# EAGLE board nanoHC06Rx (EAGLE 9.5.1)
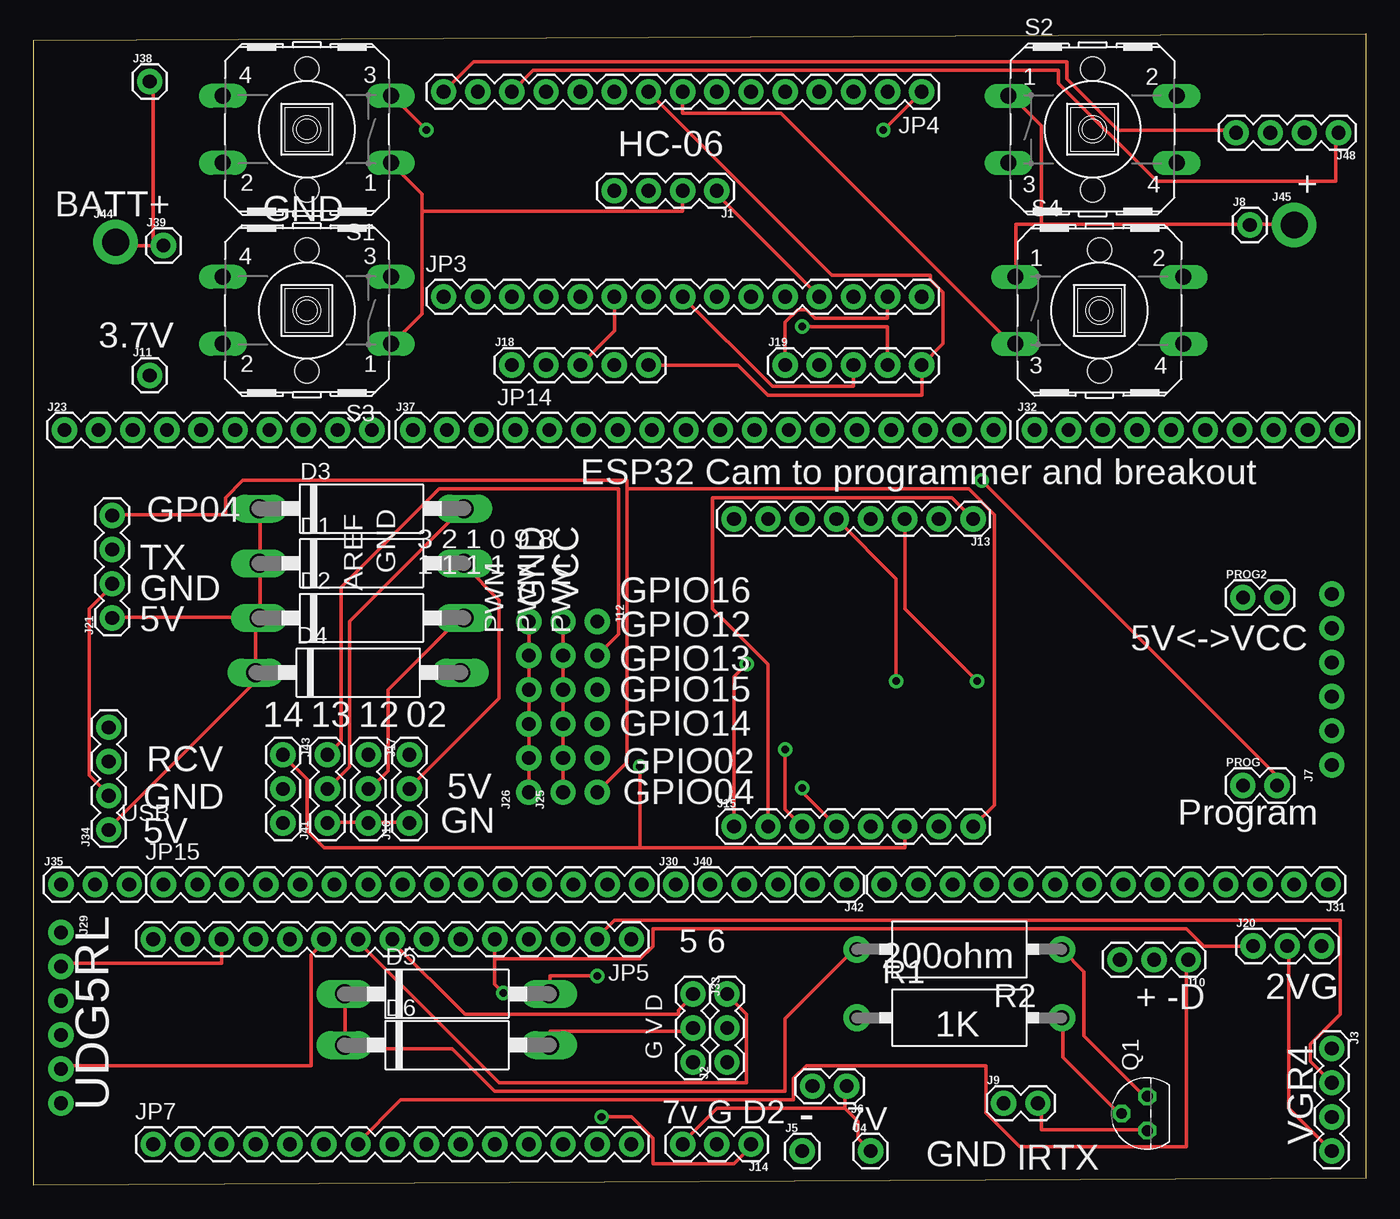
[diagram p0: board, top side]
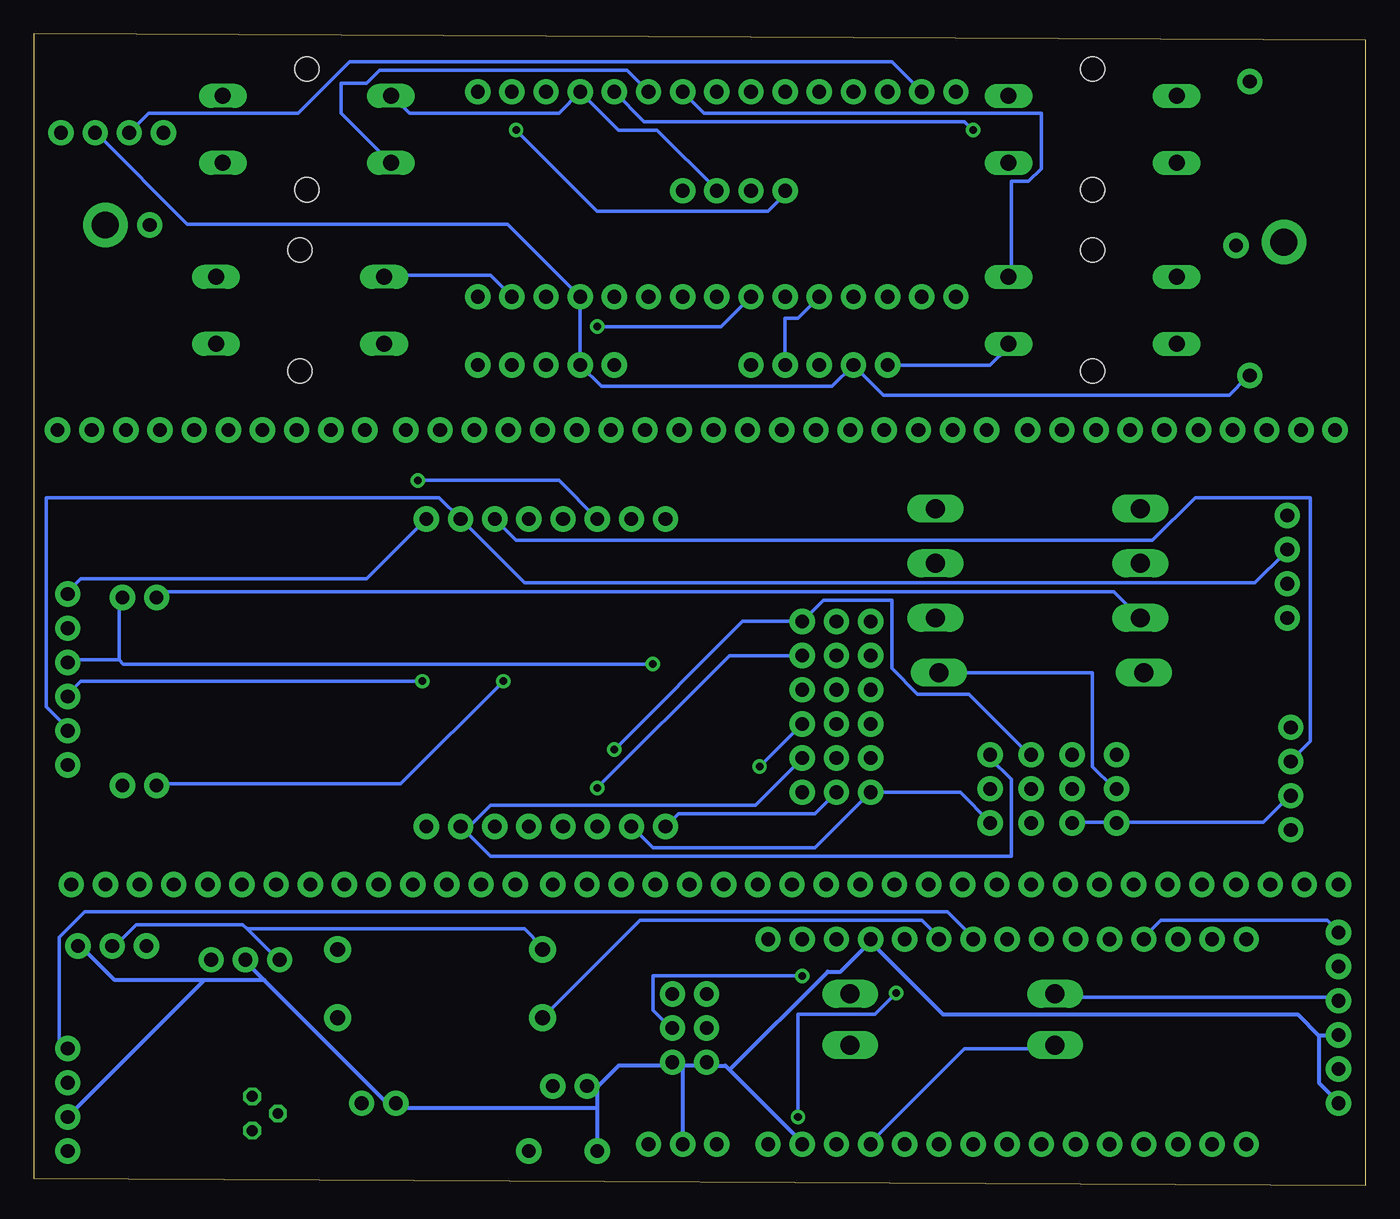
[diagram p1: board, bottom side, seen from below]

Size 99.06 x 85.6 mm. Coordinates in mm from the lower left corner, seen from the top.
Outline: 0,85.09 99.06,85.6 99.06,0.51 0,0 0,85.09
Copper layers (1*16): Top 0.035mm / dielectric 1.5mm / Bottom 0.035mm
Design rules "default": minimum track width 10mil, minimum drill 22mil, track to track 10mil, track to pad 10mil, pad to pad 10mil, via to via 16mil, smd to smd 8mil, copper to edge 30mil, drill to drill 12mil, minimum pad ring 10mil, minimum via ring 10mil, stop-mask expansion 4mil, vias tented up to drill 0mil, thermal gap 10mil
Net classes: 0 default: width 0.254 mm, clearance 0.254 mm; 1 power: width 0.61 mm, drill 0.711 mm, clearance 0.33 mm; 2 gnd: width 0.305 mm, drill 0.711 mm, clearance 0.254 mm; 3 usbvcc: width 0.508 mm, drill 0.711 mm, clearance 0.254 mm; 4 aref: width 0.406 mm
vRestrict: area 25.4,45.5 to 27.1,49.1; area 33.4,41 to 34.9,44.6; area 35.9,41 to 37.5,44.6; area 38.5,41 to 40,44.6; area 42.5,38.6 to 43.1,38.9

## Footprints (pad centres in the part's own frame; a part is rotated, then mirrored left to right if it is on the bottom)
C1702-15 = drill 1.397 long: A 7.62,0; C -7.62,0
1X04 = drill 1.016 pad 1.88: 1 0,0; 2 2.54,0; 3 5.08,0; 4 7.62,0
1X03 = drill 1.016 pad 1.88: 1 0,0; 2 2.54,0; 3 5.08,0
1X01 = drill 1.016 pad 1.88: 1 0,0
1X02 = drill 1.016 pad 1.88: 1 0,0; 2 2.54,0
1X06_NO_SILK = drill 1.016 pad 1.88: 1 0,0; 2 2.54,0; 3 5.08,0; 4 7.62,0; 5 10.16,0; 6 12.7,0
1X08 = drill 1.016 pad 1.88: 1 0,0; 2 2.54,0; 3 5.08,0; 4 7.62,0; 5 10.16,0; 6 12.7,0; 7 15.24,0; 8 17.78,0
1X05 = drill 1.016 pad 1.88: 1 0,0; 2 2.54,0; 3 5.08,0; 4 7.62,0; 5 10.16,0
1X10 = drill 1.016 pad 1.88: 1 0,0; 2 2.54,0; 3 5.08,0; 4 7.62,0; 5 10.16,0; 6 12.7,0; 7 15.24,0; 8 17.78,0; 9 20.32,0; 10 22.86,0
1X14 = drill 1.016 pad 1.88: 1 0,0; 2 2.54,0; 3 5.08,0; 4 7.62,0; 5 10.16,0; 6 12.7,0; 7 15.24,0; 8 17.78,0; 9 20.32,0; 10 22.86,0; 11 25.4,0; 12 27.94,0; 13 30.48,0; 14 33.02,0
1X01_2MM = drill 2 pad 3.302: 1 0,0
1X15@1 = drill 1.016 pad 1.88: 1 0,0; 2 2.54,0; 3 5.08,0; 4 7.62,0; 5 10.16,0; 6 12.7,0; 7 15.24,0; 8 17.78,0; 9 20.32,0; 10 22.86,0; 11 25.4,0; 12 27.94,0; 13 30.48,0; 14 33.02,0; 15 35.56,0
TO92 = drill 0.813 octagon: 1 1.27,0; 2 0,1.905; 3 -1.27,0
CA0001 = drill 1.1 pad 2: 1 -7.62,0; 2 7.62,0
B3F-40XX = drill 1.194 long: 1 -6.248,2.489; 2 6.248,2.489; 3 -6.248,-2.489; 4 6.248,-2.489 | hole 1.803: 0,-4.496; 0,4.496

## Placement (x,y rotation side)
D1  1N5333  [C1702-15]  24.38,46.23 0 top
D2  1N5333  [C1702-15]  24.38,42.16 0 top
D3  1N5333  [C1702-15]  24.38,50.29 0 top
D4  1N5333  [C1702-15]  24.13,38.1 0 top
D5  1N5333  [C1702-15]  30.73,14.22 0 top
D6  1N5333  [C1702-15]  30.73,10.41 0 top
J1  [1X04]  50.8,73.91 180 top
J2  Relay  [1X03]  51.56,9.14 90 top
J3  [1X04]  96.52,10.16 270 top
J4  [1X01]  62.23,2.54 0 top
J5  [1X01]  57.15,2.54 0 top
J6  [1X02]  60.45,7.37 180 top
J7  [1X06_NO_SILK]  96.52,31.24 90 top
J8  [1X01]  90.42,71.37 0 top
J9  [1X02]  72.14,6.1 0 top
J10  Relay  [1X03]  85.85,16.76 180 top
J11  [1X01]  8.64,60.2 0 top
J12  [1X06_NO_SILK]  41.91,41.91 270 top
J13  [1X08]  69.85,49.53 180 top
J14  Relay  [1X03]  53.34,3.05 180 top
J15  [1X08]  52.07,26.67 0 top
J16  Relay  [1X03]  27.94,26.92 90 top
J17  Relay  [1X03]  24.89,32 270 top
J18  [1X05]  35.56,60.96 0 top
J19  [1X05]  55.88,60.96 0 top
J20  Relay  [1X03]  90.68,17.78 0 top
J21  [1X04]  5.84,42.16 90 top
J23  [1X10]  2.29,56.13 0 top
J25  [1X06_NO_SILK]  39.37,29.21 90 top
J26  [1X06_NO_SILK]  36.83,29.21 90 top
J29  [1X06_NO_SILK]  2.03,18.8 270 top
J30  [1X01]  47.75,22.35 0 top
J31  [1X14]  96.27,22.35 180 top
J32  [1X10]  74.42,56.13 0 top
J33  Relay  [1X03]  49.02,14.22 270 top
J34  [1X04]  5.59,26.42 90 top
J35  [1X03]  2.03,22.35 0 top
J37  [1X03]  28.19,56.13 0 top
J38  [1X01]  8.64,82.04 0 top
J39  [1X01]  9.65,69.85 0 top
J40  [1X03]  50.29,22.35 0 top
J41  Relay  [1X03]  21.84,26.92 90 top
J42  [1X02]  60.45,22.35 180 top
J43  Relay  [1X03]  18.54,32 270 top
J44  [1X01_2MM]  6.1,70.1 0 top
J45  [1X01_2MM]  93.73,71.37 0 top
J48  [1X04]  97.03,78.23 180 top
JP3  [1X15@1]  30.48,66.04 0 top
JP4  [1X15@1]  66.04,81.28 180 top
JP5  [1X15@1]  44.45,18.29 180 top
JP7  [1X15@1]  8.89,3.05 0 top
JP14  [1X15@1]  35.81,56.13 0 top
JP15  [1X15@1]  9.65,22.35 0 top
PROG  [1X02]  89.92,29.72 0 top
PROG2  [1X02]  89.92,43.69 0 top
Q1  2N5088  [TO92]  82.8,5.33 90 top
R1  1K  [CA0001]  68.83,12.45 0 top
R2  1K  [CA0001]  68.83,17.53 180 top
S1  [B3F-40XX]  20.32,78.49 180 top
S2  [B3F-40XX]  78.74,78.49 0 top
S3  [B3F-40XX]  20.32,65.02 180 top
S4  [B3F-40XX]  79.25,65.02 0 top

## Library data of the parts
D1-D6 = diode
J1 J3 J21 J34 J48 = SparkFun-Connectors; PROD_ID: CONN-09696
J2 J10 J14 J16 J17 J20 J33 J41 J43 = SparkFun-Connectors; PROD_ID: XXX-00000
J4-J6 J8 J9 J11 J18 J19 J30 J31 J35 J37-J40 J42 J44 J45 JP3-JP5 JP7 JP14 JP15 PROG PROG2 = SparkFun-Connectors
J7 J12 J25 J26 J29 = SparkFun-Connectors; PROD_ID: CONN-08437
J13 J15 = SparkFun-Connectors; PROD_ID: CONN-08438
J23 J32 = SparkFun-Connectors; PROD_ID: CONN-11563
Q1 = transistor-npn
R1 R2 = resistor-power; OC_FARNELL: unknown; OC_NEWARK: unknown
S1-S4 = switch-omron; MF: OMRON COMPONENTS USA; MPN: B3F-4000; OC_FARNELL: 176434; OC_NEWARK: 36K3105

## Nets
3.3V_B: J13.8
5V_B: D1.C D2.C D3.C D4.C J21.1 J34.1 PROG2.1
7.4V: J4.1 J6.1 J14.3
A1_D: J18.4 JP3.5
A2_D: J18.3 JP3.6
A3_D: J19.4 JP3.7
A4_D: J19.3 JP3.8
A6_D: JP3.10
BATT_3V3_D: J38.1 J39.1 J44.1
D0: J3.2 JP5.2
D1: JP5.1
D2: J14.1 J20.1 JP5.5
D2_D: JP4.5 S1.3
D3: JP5.6 R1.1
D3_D: JP4.6 S2.3
D4: J3.1 JP5.7
D4_D: JP4.7 S3.3
D5: J33.1 JP5.8
D5_D: JP4.8 S4.3
D6: J2.3 JP5.9
D6_D: J18.5 J19.5 JP4.9
D7: J29.5 JP5.10
D8: JP5.11
D9: J29.1 JP5.12
D9_D: JP4.12
D10: J29.2 JP5.13
D10_D: J48.1 JP4.13
D11: JP5.14
D11_D: J48.3 JP4.14
D12: JP5.15
D12_D: J48.4 JP4.15
D13: JP7.1
D13_D: JP3.1
D14: JP7.4
D15: JP7.5
D16: JP7.6
D17: J10.1 JP7.7
D18: JP7.8
D19: JP7.9
D20: JP7.10
D21: JP7.11
GND [gnd]: J2.1 J3.3 J5.1 J6.2 J9.1 J10.2 J14.2 J20.3 J29.4 J29.6 J33.3 JP5.4 JP7.14
GND_B: J7.6 J13.1 J15.2 J16.1 J17.3 J21.2 J26.1 J26.2 J26.3 J26.4 J26.5 J26.6 J34.2 J41.1 J43.3
GND_D: J1.2 J8.1 J18.1 J19.1 J45.1 JP3.14 JP4.4 S1.1 S2.1 S3.1 S4.1
GPIO02_B: J12.5 J15.7 J16.3
GPIO04_B: J12.6 J15.8 J21.4
GPIO12_B: J12.1 J15.3 J17.1
GPIO13_B: J12.2 J15.4 J41.3
GPIO14_B: J12.4 J15.6 J43.1
GPIO15_B: J15.5
GPIO16_B: J13.7
IRTX: J9.2 Q1.3
N$1: Q1.2 R1.2
N$2: D1.A J16.2
N$3: Q1.1 R2.1
N$4: D2.A J17.2
N$5: D3.A J41.2
N$6: D4.A J43.2
N$7: D5.A J2.2
N$8: D6.A J33.2
PROG1: J13.5 PROG.1
PROG2: J13.6 PROG.2
RX_D: JP4.2
TX_D: J1.4 JP4.1
UOR: J7.3 J13.3 J34.3
UOT: J7.2 J13.2 J21.3
VCC: D5.C D6.C J3.4 J10.3 J20.2 J29.3 JP7.12 R2.2
VCC_B: J7.4 J15.1 J25.1 J25.2 J25.3 J25.4 J25.5 J25.6 PROG2.2
VCC_D: J1.1 J11.1 J18.2 J19.2 J48.2 JP3.12

## Tracks (layer width: path | path; a pad name or v marks a point on that pad's centre or on a via)
5V_B
  Top 0.254: J34.1 5.71,26.67 16.51,37.47 D4.C 16.51,41.91 D2.C | D3.C 16.83,50.16 16.83,46.35 D1.C 16.83,46.04 16.83,42.23 D2.C | J21.1 6.03,42.23 16.51,42.23 D2.C
  Bottom 0.254: D2.C 18.73,44.13 89.53,44.13 89.85,43.81 PROG2.1
7.4V
  Top 0.254: 60.33,5.71 50.8,5.71 48.26,3.17 J14.3 | 60.33,5.71 60.33,7.3 J6.1 | J4.1 61.28,3.49 61.28,4.76 60.33,5.71
A1_D
  Bottom 0.254: J18.4 43.18,64.45 42.23,64.45 JP3.5
A2_D
  Top 0.254: J18.3 43.18,63.5 JP3.6
A3_D  (via drill 0.56)
  Top 0.254: v57.15,63.82 63.5,63.82 J19.4
  Bottom 0.254: JP3.7 47.94,63.82 v57.15,63.82
A4_D
  Top 0.254: JP3.8 54.93,59.37 60.96,59.37 J19.3
BATT_3V3_D
  Top 0.254: 8.89,69.85 6.35,69.85 J44.1 | 8.89,69.85 J39.1 9.53,69.85 | 8.89,69.85 8.89,81.92 J38.1
D0
  Top 0.254: J3.2 94.93,9.21 94.93,10.48 97.16,12.7 97.16,19.68 43.18,19.68 41.91,18.41 JP5.2
D2  (via drill 0.56)
  Top 0.254: v42.23,5.08 44.45,5.08 46.04,3.49 46.04,1.59 52.07,1.59 53.34,2.86 J14.1 | v34.92,14.29 34.29,14.92 34.29,16.83 | JP5.5 34.29,16.83 | J20.1 87,17.78 85.72,19.05 46.04,19.05 46.04,17.78 45.09,16.83 34.29,16.83
  Bottom 0.254: v42.23,5.08 42.23,12.7 36.51,12.7 v34.92,14.29
D2_D  (via drill 0.56)
  Top 0.254: v29.21,78.42 26.67,80.96 S1.3
  Bottom 0.254: v29.21,78.42 29.84,79.06 53.66,79.06 JP4.5
D3
  Bottom 0.254: R1.1 53.98,19.68 33.02,19.68 31.75,18.41 JP5.6
D3_D
  Bottom 0.254: JP4.6 54.93,82.87 73.34,82.87 74.3,81.92 76.2,81.92 76.2,79.69 72.71,76.2 S2.3
D4
  Bottom 0.254: J3.1 97.16,10.16 97.16,18.41 95.25,20.32 31.11,20.32 29.21,18.41 JP5.7
D4_D
  Bottom 0.254: JP4.7 49.21,79.69 24.13,79.69 24.13,75.56 25.08,74.61 26.35,74.61 26.35,67.63 S3.3
D5
  Top 0.254: JP5.8 26.67,18.1 32.07,12.7 47.94,12.7 47.94,13.02 48.9,13.97 J33.1
D5_D
  Top 0.254: JP4.8 48.26,79.69 55.56,79.69 72.71,62.55 S4.3
D6
  Top 0.254: JP5.9 24.13,18.1 34.61,7.62 53.02,7.62 53.02,12.7 51.75,13.97 J2.3
D6_D
  Top 0.254: J18.5 52.39,60.96 54.61,58.74 66.04,58.74 J19.5 67.63,62.55 67.63,66.36 66.67,67.31 66.67,67.63 59.37,67.63 JP4.9
D7
  Top 0.254: J29.5 2.22,8.89 20.64,8.89 20.64,17.14 21.59,18.1 JP5.10
D9
  Bottom 0.254: J29.1 2.22,19.05 2.86,19.68 15.24,19.68 16.51,18.41 JP5.12
D10
  Top 0.254: JP5.13 13.97,16.51 2.22,16.51 J29.2
D10_D
  Top 0.254: JP4.13 37.15,82.87 76.2,82.87 76.2,81.92 83.5,74.61 96.84,74.61 96.84,78.11 J48.1
D11_D
  Bottom 0.254: JP4.14 35.24,83.5 75.56,83.5 79.38,79.69 90.49,79.69 J48.3
D12_D
  Top 0.254: JP4.15 32.7,83.5 76.83,83.5 76.83,82.23 80.64,78.42 89.22,78.42 J48.4
D17
  Top 0.254: JP7.7 24.13,3.17 27.3,6.35 56.52,6.35 56.52,7.94 57.47,8.89 70.8,8.89 70.8,5.4 73.34,2.86 85.72,2.86 85.72,16.51 J10.1
GND
  Bottom 0.305: 57.15,7.3 57.15,5.71 | 57.15,5.71 J5.1 | 57.15,7.3 57.78,7.3 J6.2 57.15,7.3 | 57.15,5.71 71.75,5.71 J9.1 72.39,6.35 73.03,6.35 81.92,15.24 | 81.92,15.24 83.19,16.51 J10.2 | 81.92,15.24 86.36,15.24 | 86.36,15.24 93.03,15.24 95.57,17.78 J20.3 | 86.36,15.24 J3.3 | 50.8,8.89 J14.2 | 50.8,8.89 51.44,8.89 J2.1 | 3.49,11.11 3.49,7.62 2.22,6.35 J29.6 | 3.49,11.11 2.22,11.11 J29.4 | 47.31,8.57 47.62,8.89 48.9,8.89 J33.3 49.21,8.89 50.8,8.89 | 47.31,8.57 41.91,3.17 JP7.14 | 36.83,18.1 39.05,15.88 40.01,15.88 47.31,8.57 | 3.49,11.11 5.08,12.7 31.43,12.7 36.83,18.1 | 36.83,18.1 JP5.4 | 50.8,8.89 J2.1 | 57.15,7.3 55.56,8.89 51.75,8.89 J2.1
GND_B
  Top 0.254: J16.1 27.94,26.99 25.08,26.99 J17.3 24.77,26.99 21.91,26.99 J41.1 | J21.2 5.71,44.45 4.13,42.86 4.13,30.48 5.4,29.21 J34.2 | J26.6 J26.5 J26.4 J26.3 J26.2 J26.1 | J13.1 68.26,51.12 50.48,51.12 50.48,42.86 54.61,38.73 J15.2
  Bottom 0.254: J41.1 21.59,26.99 18.73,26.99 J43.3 18.41,26.99 7.62,26.99 5.71,28.89 J34.2 | J13.1 74.3,45.09 95.57,45.09 96.52,44.13 J7.6 | J15.2 53.02,25.08 40.96,25.08 J26.1 30.16,29.21 27.94,26.99 J16.1
GND_D
  Top 0.254: J45.1 93.66,71.44 90.49,71.44 J8.1 90.17,71.44 74.93,71.44 | J19.1 55.88,64.14 56.83,65.09 57.47,65.09 58.1,64.45 63.5,64.45 JP3.14 | 74.93,71.44 73.03,71.44 73.03,67.63 S4.1 | 28.89,72.39 28.89,64.77 26.67,62.55 S3.1 | 28.89,72.39 28.89,73.66 26.67,75.88 S1.1 | 28.89,72.39 48.26,72.39 J1.2 | 74.93,71.44 74.93,78.74 72.71,80.96 S2.1
  Bottom 0.254: JP3.14 65.09,67.63 72.71,67.63 S4.1 | J18.1 27.94,60.96 26.67,62.23 S3.1 | S2.1 72.39,80.96 71.12,79.69 60.01,79.69 JP4.4 55.56,78.42 52.7,78.42 48.26,73.98 J1.2
GPIO02_B
  Bottom 0.254: 66.99,26.35 65.09,24.45 26.35,24.45 26.35,30.16 27.94,31.75 J16.3 | J12.5 45.4,28.26 65.09,28.26 66.99,26.35 | 66.99,26.35 J15.7
GPIO04_B
  Top 0.254: 44.13,51.75 44.13,31.43 J12.6 | 44.13,51.75 44.13,52.39 15.56,52.39 14.29,51.12 14.29,49.85 6.03,49.85 J21.4 | J15.8 71.44,28.26 71.44,49.85 69.53,51.75 44.13,51.75
GPIO12_B  (via drill 0.56)
  Top 0.254: J15.3 55.88,27.94 v55.88,32.38
  Bottom 0.254: J17.1 25.08,32.07 29.53,36.51 33.34,36.51 35.24,38.42 35.24,43.5 40.32,43.5 J12.1 46.35,41.91 v55.88,32.38
GPIO13_B  (via drill 0.56)
  Top 0.254: J41.3 22.86,33.02 22.86,44.45 30.16,51.75 43.5,51.75 43.5,40.96 J12.2 | J15.4 57.15,29.21 v57.15,29.53
  Bottom 0.254: v57.15,29.53 47.31,39.37 J12.2
GPIO14_B  (via drill 0.56)
  Top 0.254: 45.09,25.08 64.77,25.08 J15.6 | 45.09,25.08 21.59,25.08 20.32,26.35 20.32,30.16 18.73,31.75 J43.1 | 45.09,25.08 v45.09,31.11
  Bottom 0.254: v45.09,31.11 J12.4
IRTX
  Top 0.254: Q1.3 82.55,4.13 74.93,4.13 74.93,6.03 J9.2
N$1
  Top 0.254: Q1.2 80.64,5.4 76.52,9.53 76.52,12.38 R1.2
N$2
  Top 0.254: J16.2 27.94,29.53 34.61,36.2 34.61,43.5 32.07,46.04 D1.A
N$3
  Top 0.254: R2.1 78.11,15.88 78.11,11.11 82.55,6.67 Q1.1
N$4
  Top 0.254: J17.2 25.08,29.53 26.35,30.8 26.35,36.83 31.75,42.23 D2.A
N$5
  Top 0.254: J41.2 23.5,31.11 23.5,41.91 31.75,50.16 D3.A
N$6
  Bottom 0.254: D4.A 20.32,38.1 20.32,31.11 18.73,29.53 J43.2
N$7  (via drill 0.56)
  Top 0.254: v41.91,15.56 38.42,15.56 38.42,14.29 D5.A
  Bottom 0.254: v41.91,15.56 53.02,15.56 53.02,13.02 51.75,11.75 J2.2
N$8
  Top 0.254: J33.2 48.9,11.43 38.42,11.43 38.42,10.48 D6.A
PROG1  (via drill 0.56)
  Top 0.254: J13.5 64.14,45.09 v64.14,37.47
  Bottom 0.254: v64.14,37.47 71.75,29.84 89.85,29.84 PROG.1
PROG2  (via drill 0.56)
  Top 0.254: v70.48,52.39 92.39,30.48 92.39,29.84 PROG.2
  Bottom 0.254: J13.6 60.01,52.39 v70.48,52.39
TX_D  (via drill 0.56)
  Top 0.254: JP4.1 v63.18,78.42
  Bottom 0.254: v63.18,78.42 57.15,72.39 44.45,72.39 43.18,73.66 J1.4
UOR  (via drill 0.56)
  Top 0.254: v70.17,37.47 64.77,42.86 J13.3
  Bottom 0.254: J13.3 63.18,47.94 15.88,47.94 12.7,51.12 4.13,51.12 4.13,33.02 5.4,31.75 J34.3 | v70.17,37.47 95.57,37.47 96.52,36.51 J7.3
UOT
  Bottom 0.254: J21.3 6.03,46.99 8.26,44.77 62.55,44.77 J13.2 68.9,51.12 98.11,51.12 98.11,35.56 96.52,33.97 J7.2
VCC
  Top 0.254: D5.C 23.18,13.97 23.18,10.48 D6.C 23.18,10.16 31.11,10.16 34.29,6.99 55.88,6.99 55.88,12.38 60.96,17.46 R2.2 | J3.4 93.34,5.71 93.34,17.78 J20.2
  Bottom 0.254: JP7.12 36.83,3.17 29.84,10.16 23.18,10.16 D6.C | J29.3 2.22,13.97 22.86,13.97 D5.C | 83.19,19.05 83.5,19.37 91.44,19.37 93.03,17.78 J20.2 | 83.19,19.05 80.96,16.83 J10.3 | 83.19,19.05 62.55,19.05 61.28,17.78 R2.2
VCC_B  (via drill 0.56)
  Top 0.254: J25.6 J25.5 J25.4 J25.3 J25.2 J25.1 | v53.02,38.73 52.07,37.78 J15.1
  Bottom 0.254: 92.71,39.05 92.71,43.5 PROG2.2 | 92.71,39.05 96.52,39.05 J7.4 | J15.1 51.12,27.62 40.96,27.62 J25.1 | 92.71,39.05 92.39,38.73 v53.02,38.73
VCC_D
  Top 0.254: JP3.12 50.8,73.66 J1.1
  Bottom 0.254: J11.1 8.89,60.01 10.16,58.74 35.88,58.74 J18.2 39.69,59.37 56.83,59.37 J19.2 JP3.12 63.82,71.44 87.63,71.44 94.3,78.11 J48.2

## Text on the board
tNames: 3 2 1 0 9 8 | GND | 1 1 1 1 | AREF | PWM | PWM | PWM | USB
Reference: C8 | C2 | R11 | C4 | C5
_tsilk: HC-06 | + | BATT+ | GND | 3.7V | ESP32 Cam to programmer and breakout | GP04 | GND | VCC | TX | GPIO16 | GND | GPIO12 | 5V<->VCC | 5V | GPIO13 | GPIO15 | GPIO14 | 14 | 13 | 12 | 02 | GPIO02 | RCV | GPIO04 | 5V | Program | GND | GN | 5V | 200ohm | 5 6 | 2VG | + -D | G V D | 1K | VGR4 | UDG5RL | 7v G D2 | - | 7V | GND | IRTX